# Altium PCB AdamCapteurs.PcbDoc
Units mm, origin at the board's own origin, x right, y up, seen from the top; angles counter-clockwise.
Board outline 70.48 x 48.26 mm, 2 copper layers (Top Layer, Bottom Layer); 61 components, 47 nets, 235 pads, 65 vias.
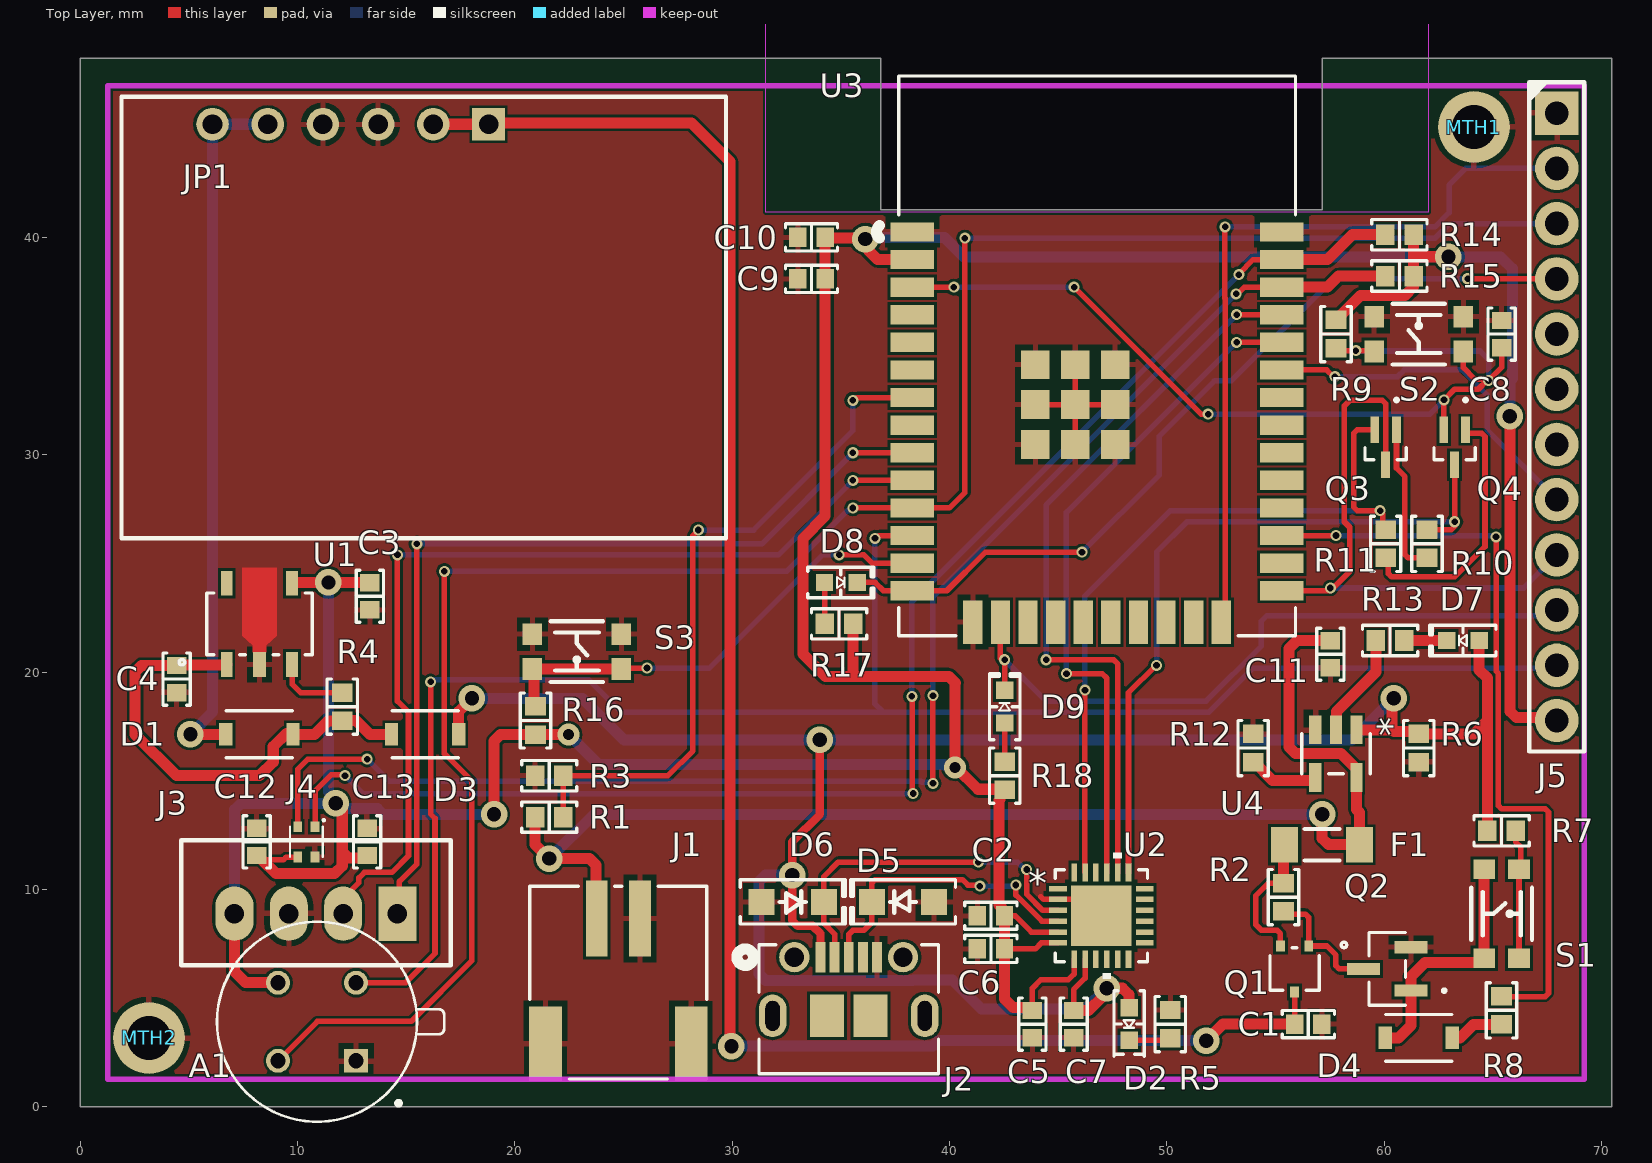
[diagram p0: Top Layer view]
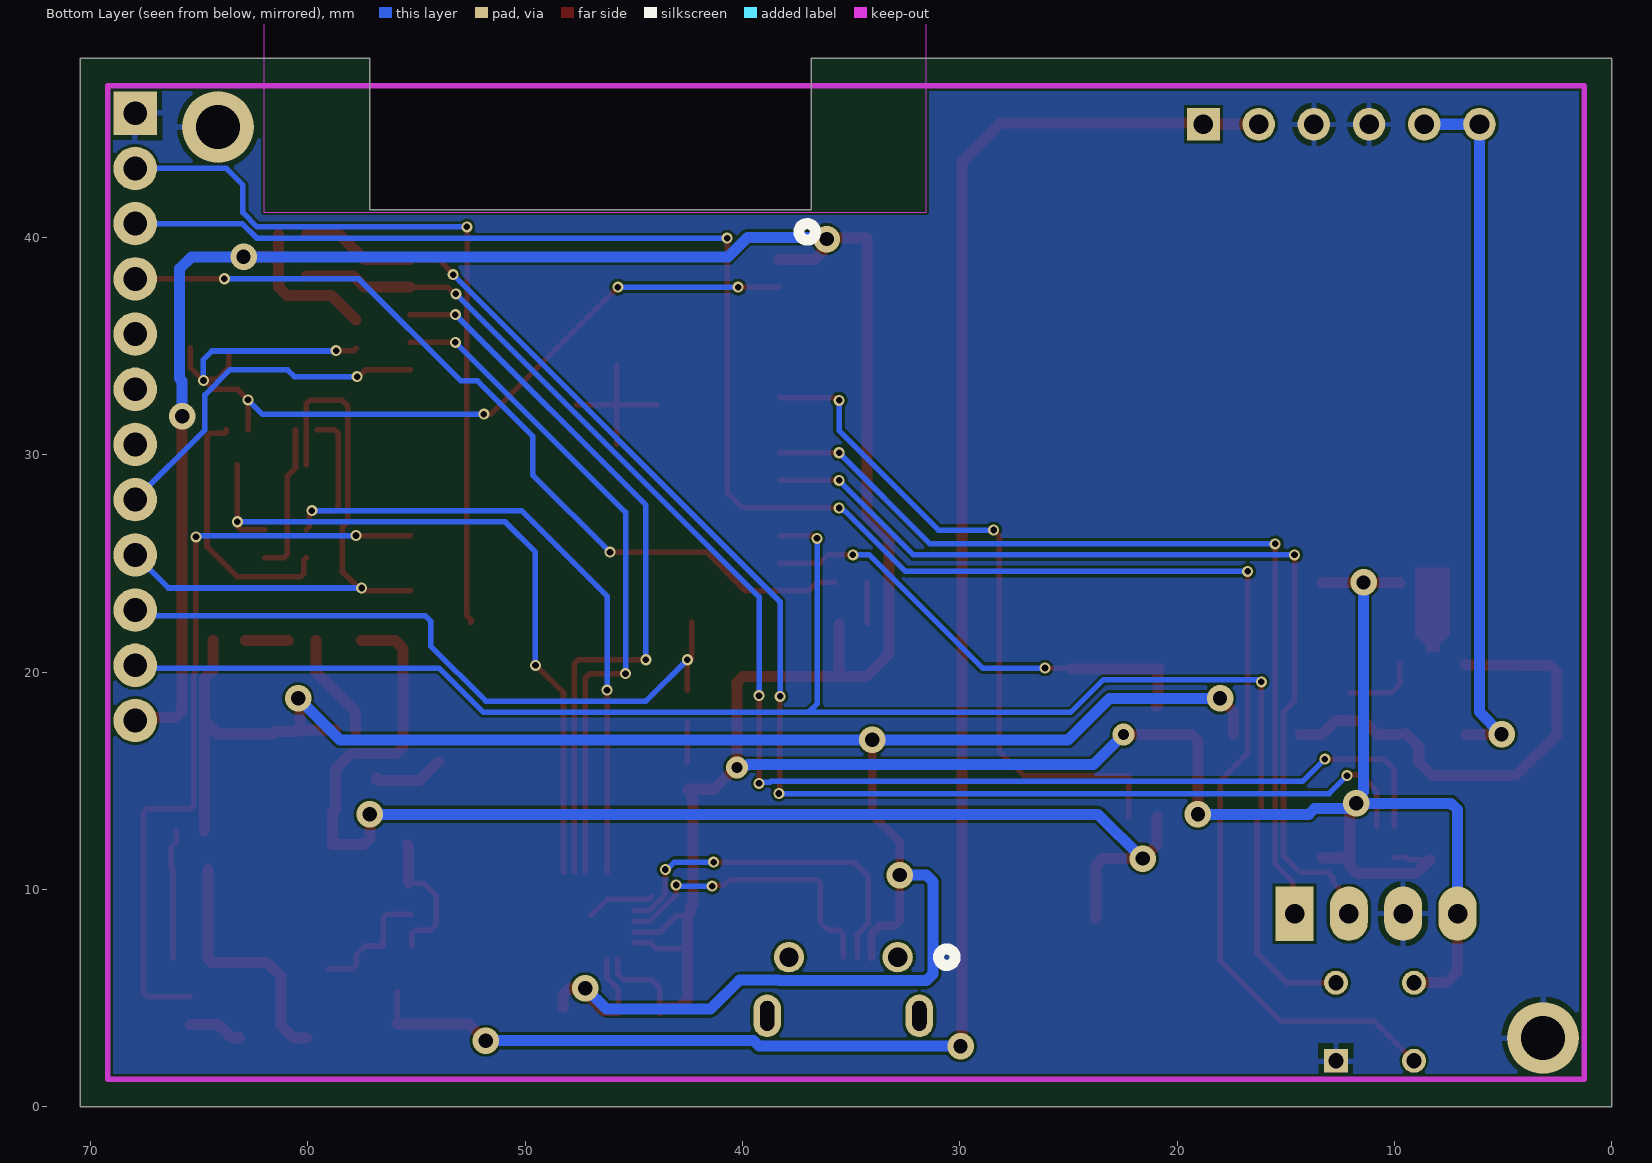
[diagram p1: Bottom Layer view, seen from below]
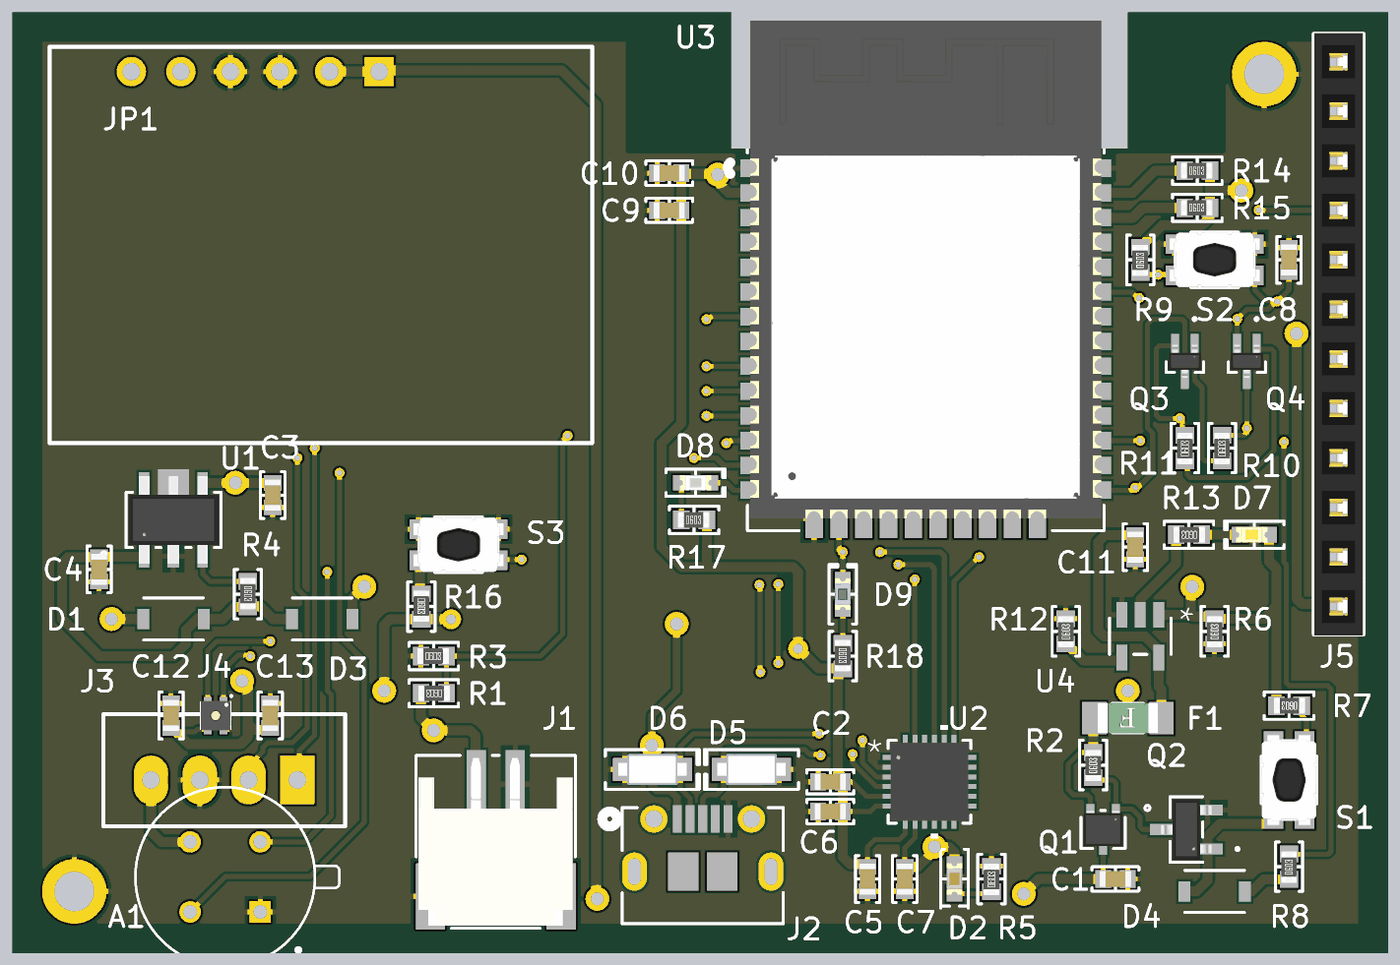
[diagram p2: 3D render of the assembled board from above, using the file's embedded part models]

## Layer stack, top to bottom
Top Solder: solder mask 0.0102, Solder Resist, Dk 3.5
Top Layer: signal copper 0.0356
Dielectric 1: dielectric 0.32, FR-4, Dk 4.8
Bottom Layer: signal copper 0.0356
Bottom Solder: solder mask 0.0102, Solder Resist, Dk 3.5

## Board outline
0,0 70.485,0 70.485,48.26 57.15,48.26 57.15,41.275 36.83,41.275 36.83,48.26 0,48.26

## Design rules (kind name [scope] priority, off if disabled: settings)
Clearance [All] p1: gap=0.127 ignorepadtopadclearanceinfootprint=FALSE
HoleSize [All] p1: absolutevalues=TRUE maxlimit=22.86 minlimit=0.3 maxpercent=80.000 minpercent=20.000
MinimumSolderMaskSliver [All] p1: minsoldermaskwidth=0.127
PolygonConnect [All] p1: thpad.connectstyle=Relief thpad.reliefconductorwidth=0.254 thpad.reliefentries=4 thpad.polygonreliefangle="90 Angle" thpad.airgapwidth=0.254 smdpad.connectstyle=Relief smdpad.reliefconductorwidth=0.254 smdpad.reliefentries=4 smdpad.polygonreliefangle="90 Angle" smdpad.airgapwidth=0.254 via.connectstyle=Direct via.reliefconductorwidth=0.254 via.reliefentries=4 via.polygonreliefangle="90 Angle" via.airgapwidth=0.254
RoutingVias [All] p1: holewidth=0.711 width=1.27 viastyle="Through Hole" minholewidth=0.3 minwidth=0.5 maxholewidth=0.711 maxwidth=1.27
SilkToSilkClearance [All] p1: silktosilkclearance=0
SilkToSolderMaskClearance [IsPad] p1: minsilkscreentomaskgap=0 clearancetoexposedcopper=TRUE
SolderMaskExpansion [All] p1: expansion=0.102 istentingtop=FALSE
Width [All] p1: maxlimit=2.54 minlimit=0.254 preferedwidth=0.254 minimp=50.000000 maximp=50.000000 favimp=50.000000
26 further rules are at their usual default settings.

## Classes and differential pairs
component class AdamCapteurs-2: A1 C12 C13 D8 D9 J3 J4 J5 R14 R15 R16 R17 R18 S3 U3
component class AdamCapteurs-1: C1 C2 C3 C4 C5 C6 C7 C8 C9 C10 C11 D1 D2 D3 D4 D5 D6 D7 F1 J1 J2 JP1 MTH1 MTH2 Q1 Q2 Q3 Q4 R1 R2 R3 R4 R5 R6 R7 R8 R9 R10 R11 R12 R13 S1 S2 U1 U2 U4

## Components (designator, comment, footprint, x,y, rotation, side; value= is the part's Value field where it differs from the comment)
A1 "PYQ_1548/7660" TO254P940H440-4 10.904,3.919 r180 top
C1 "10 µF" "CAP 0603" 56.515,3.81 r180 top
C2 "10 µF" "CAP 0603" 41.91,8.796 r0 top
C3 "10 µF" "CAP 0603" 13.335,23.495 r90 top
C4 "10 µF" "CAP 0603" 4.445,19.685 r90 top
C5 "10 µF" "CAP 0603" 43.815,3.81 r90 top
C6 "100 nF" "CAP 0603" 41.91,7.272 r0 top
C7 "100 nF" "CAP 0603" 45.72,3.81 r90 top
C8 "10 µF" "CAP 0603" 65.405,35.56 r270 top
C9 "100 nF" "CAP 0603" 33.655,38.1 r0 top
C10 "100 nF" "CAP 0603" 33.655,40.005 r0 top
C11 "10 µF" "CAP 0603" 57.531,20.828 r90 top
C12 "100 nF" "CAP 0603" 8.128,12.192 r270 top
C13 "100 nF" "CAP 0603" 13.208,12.192 r270 top
D1 "PMEG2010ER,115" DIODE_PMEG2010ER,115_NEX 8.255,17.145 r180 top
D2 "Red" "Red Led 0603" 48.26,3.81 r270 top
D3 "PMEG2010ER,115" DIODE_PMEG2010ER,115_NEX 15.875,17.145 r0 top
D4 "PMEG2010ER,115" DIODE_PMEG2010ER,115_NEX 61.595,3.175 r0 top
D5 "CPDQ5V0-HF" SOD123F 37.868,9.431 r180 top
D6 "CPDQ5V0-HF" SOD123F 32.788,9.431 r0 top
D7 "Yellow" "YELLOW LED 0603 - duplicate" 63.452,21.461 r180 top
D8 "Green" "Green LED 0603" 34.925,24.13 r0 top
D9 "Blue" "Blue LED 0603" 42.545,18.415 r90 top
F1 "0ZCJ0100FF2E" "Fuse 500mA 0.6mm" 57.15,12.065 r180 top
J1 "CONN JST 2P SM 90DEG" S2B-PH-SM4-TB_LF__SN 24.765,5.715 r0 top
J2 "Micro USB" CONN_1050170001_MOL 35.368,4.496 r0 top
J3 "B4B-XH-A(LF)(SN)" "CONN JST 4PIN" 10.855,8.89 r180 top
J4 "SHT4XI-DIGITAL" SHT4XI-DIGITAL 10.414,12.192 r270 top
J5 "PPTC121LFBN-RC" "CONN 12PIN FEMALE" 67.945,31.777 r0 top
JP1 "Boost Regulator" HDR1X6-Power 18.796,45.212 r180 top
MTH1 "HOLE" MNT_hole 64.135,45.085 r0 top
MTH2 "HOLE" MNT_hole 3.175,3.175 r90 top
Q1 "SSM3J130TU,LF" UFM_TOS 55.88,6.35 r180 top
Q2 "MMBT2222AM3T5G" SOT_4C-E3-08_VIS-M 60.147,6.35 r90 top
Q3 "MMBT2222ATT1G" SOT-416_1P65X0P9_ONS-M 60.071,30.353 r180 top
Q4 "MMBT2222ATT1G" SOT-416_1P65X0P9_ONS-M 63.246,30.353 r180 top
R1 "100K" "RES 0603" 21.59,13.335 r180 top
R2 "10K" "RES 0603" 55.372,9.652 r90 top
R3 "100K" "RES 0603" 21.59,15.24 r0 top
R4 "100K" "RES 0603" 12.065,18.415 r270 top
R5 "330" "RES 0603" 50.165,3.81 r90 top
R6 "100K" "RES 0603" 61.595,16.51 r90 top
R7 "4K7" "RES 0603" 65.405,12.7 r180 top
R8 "1K" "RES 0603" 65.405,4.445 r90 top
R9 "10K" "RES 0603" 57.785,35.56 r90 top
R10 "10K" "RES 0603" 61.976,25.908 r90 top
R11 "10K" "RES 0603" 60.071,25.908 r90 top
R12 "4K7" "RES 0603" 53.975,16.51 r90 top
R13 "330" "RES 0603" 60.277,21.461 r180 top
R14 "4K7" "RES 0603" 60.706,40.132 r0 top
R15 "4K7" "RES 0603" 60.706,38.227 r0 top
R16 "4K7" "RES 0603" 20.955,17.78 r270 top
R17 "330" "RES 0603" 34.925,22.225 r0 top
R18 "330" "RES 0603" 42.545,15.24 r270 top
S1 "KMR741NG ULC LFS" "Switch Lin SMD" 65.405,8.89 r270 top
S2 "KMR741NG ULC LFS" "Switch Lin SMD" 61.595,35.56 r0 top
S3 "KMR741NG ULC LFS" "Switch Lin SMD" 22.86,20.955 r180 top
U1 "AP2112K-3.3TRG1" AP2112R5-3.3TRG1_DIO 8.255,22.225 r0 top
U2 "CP2104-F03-GMR" QFN_F03-GMR_SIL-M 46.99,8.796 r0 top
U3 "ESP32-WROOM-32 (8MB)" ESP32-WROOM-32D 46.794,34.555 r0 top
U4 "MCP73831T-2ACI/OT" SOT23_MCP73831T-2ACI/OT_HNW 57.785,16.256 r270 top

## Footprints (in the part's own frame and the unit in brackets; to place one, negate y for a bottom-side part, rotate by r counter-clockwise, add the part's x,y. Pads: shape width x height; smd on the part's side, far side on the other; paste and mask are expansions set on the pad)
AP2112R5-3.3TRG1_DIO [mil]
  rect 21x45 smd paste+0 mask+0: 1(-59.06,-73.5) 3(59.06,-73.5) 4(59.06,73.5) 5(-59.06,73.5)
  rect 24x45 smd paste+0 mask+0: 2(0,-73.5)
  Top Layer region: 12,-51 -12,-51 -12,-39 -31.5,-21.5 -31.5,102 -10.5,102 10.5,102 31.5,102 31.5,-21.5 12,-39
  silkscreen extent -145,-74 96,56, body extent -91,-88 91,88, height 65
"Blue LED 0603" [mm] "Blue LED"
  rect 0.8x0.8 smd: 1(-0.75,0) 2(0.75,0)
  silkscreen extent -1.52,-0.7 1.52,0.7, body extent -0.8,-0.4 0.8,0.4, height 0.53
"CAP 0603" [mm] "Cap ceramique 0603"
  rect 0.8x0.9 smd: 1(-0.625,0) 2(0.625,0)
  silkscreen extent -1.2,-0.63 1.2,0.63, body extent -0.8,-0.41 0.8,0.41, height 0.82
"CONN 12PIN FEMALE" [mm] "12 pin female conn 0.5mm spacing"
  rect 2x2 hole 1.1: 1(0,13.943)
  round 2 hole 1.1: 2(0,11.403) 3(0,8.863) 4(0,6.323) 5(0,3.783) 6(0,1.243) 7(0,-1.297) 8(0,-3.837) 9(0,-6.377) 10(0,-8.917) 11(0,-11.457) 12(0,-13.997)
  silkscreen extent -1.27,-15.43 1.27,15.4, body extent -1.25,-15.47 1.25,15.41, height 8.5
"CONN JST 4PIN" [mm] "Conn 4 pin JST"
  rect 1.75x2.5 hole 0.9: 1(-3.75,0)
  oval 1.75x2.5 hole 0.9: 2(-1.25,0) 3(1.25,0) 4(3.75,0)
  silkscreen extent -6.2,-3.38 6.2,2.38
CONN_1050170001_MOL [mil]
  rect 18x55 smd paste+0 mask+0: 1(-51.18,94.28) 2(-25.59,94.28) 3(0,94.28) 4(25.59,94.28) 5(51.18,94.28)
  rect 61x77 smd: 6(-39.37,-12.02) 7(39.37,-12.02)
  round 55 hole 35 mask+0: 8(-98.43,94.28) 9(98.43,94.28)
  oval 50x77 hole 26 slot 54 at 90 deg mask+0: S_1(-137.8,-12.02) S_2(137.8,-12.02)
  Multi-Layer lines w26: -137.8,-25.52 -137.8,1.48 ; 137.8,-25.52 137.8,1.48
  silkscreen extent -202,-117 162,117, body extent 0,0 10,10, height 10
DIODE_PMEG2010ER,115_NEX [mil]
  rect 24x41 smd paste+0 mask+0: 1(-60.83,0) 2(60.83,0)
  silkscreen extent -60,-43 60,43, body extent 0,0 10,10, height 10
ESP32-WROOM-32D [mil] "ESP32-WROOM-32D"
  rect 79x35 smd paste+0 mask+0: 1(-334.65,224.56) 2(-334.65,174.56) 3(-334.65,124.56) 4(-334.65,74.56) 5(-334.65,24.56) 6(-334.65,-25.44) 7(-334.65,-75.44) 8(-334.65,-125.44) 9(-334.65,-175.44) 10(-334.65,-225.44) 11(-334.65,-275.44) 12(-334.65,-325.44) 13(-334.65,-375.44) 14(-334.65,-425.44) 25(334.65,-425.44) 26(334.65,-375.44) 27(334.65,-325.44) 28(334.65,-275.44) 29(334.65,-225.44) 30(334.65,-175.44) 31(334.65,-125.44) 32(334.65,-75.44) 33(334.65,-25.44) 34(334.65,24.56) 35(334.65,74.56) 36(334.65,124.56) 37(334.65,174.56) 38(334.65,224.56)
  rect 35x79 smd: 15(-225,-482.18) 16(-175,-482.18) 17(-125,-482.18) 18(-75,-482.18) 19(-25,-482.18) 20(25,-482.18) 21(75,-482.18) 22(125,-482.18) 23(175,-482.18) 24(225,-482.18)
  rect 52x52 smd: 39(-111.78,-160.44) 39(-111.78,-88.2) 39(-111.78,-15.96) 39(-39.54,-160.44) 39(-39.54,-88.2) 39(-39.54,-15.96) 39(32.71,-160.44) 39(32.71,-88.2) 39(32.71,-15.96)
  Keep-Out Layer region: -600,700 600,700 600,260 -600,260
  silkscreen extent -400,-507 360,507, body extent -354,-482 354,522, height 128
"Fuse 500mA 0.6mm" [mm]
  rect 1.25x1.65 smd: 1(-1.725,0) 2(1.725,0)
  silkscreen extent -0.8,-0.72 0.8,0.72, body extent -1.55,-0.77 1.55,0.78, height 0.76
"Green LED 0603" [mm] "Green led SMD"
  rect 0.8x0.8 smd: 1(-0.671,0) 2(0.829,0)
  silkscreen extent -1.45,-0.7 1.6,0.7, body extent -0.72,-0.4 0.88,0.4, height 0.53
HDR1X6-Power [mm] "Connector; Header; 6 Position"
  rect 1.5x1.5 hole 0.9: 1(0,0)
  round 1.5 hole 0.9: 2(2.54,0) 3(5.08,0) 4(7.62,0) 5(10.16,0) 6(12.7,0)
  silkscreen extent -10.92,-1.27 16.89,19.05
MNT_hole [mil]
  round 130 hole 80: 1(0,0)
QFN_F03-GMR_SIL-M [mil]
  rect 32x10 smd paste+0 mask+0: 1(-78.5,49.23) 2(-78.5,29.53) 3(-78.5,9.84) 4(-78.5,-9.85) 5(-78.5,-29.54) 6(-78.5,-49.23) 13(78.5,-49.23) 14(78.5,-29.54) 15(78.5,-9.85) 16(78.5,9.84) 17(78.5,29.53) 18(78.5,49.23)
  rect 10x32 smd paste+0 mask+0: 7(-49.22,-78.5) 8(-29.53,-78.5) 9(-9.84,-78.5) 10(9.84,-78.5) 11(29.53,-78.5) 12(49.22,-78.5) 19(49.22,78.5) 20(29.53,78.5) 21(9.84,78.5) 22(-9.84,78.5) 23(-29.53,78.5) 24(-49.22,78.5)
  rect 110x110 smd paste-54.5 mask+0: 25(0,0)
  silkscreen extent -84,-114 84,114, body extent -79,-79 79,79, height 32
"Red Led 0603" [mm] "red led smd"
  rect 0.8x0.8 smd: 1(-0.756,0.008) 2(0.744,0.008)
  silkscreen extent -1.53,-0.69 1.49,0.71, body extent -0.81,-0.39 0.79,0.41, height 0.53
"RES 0603" [mm]
  rect 0.85x0.95 smd: 1(-0.65,0) 2(0.65,0)
  silkscreen extent -1.27,-0.7 1.27,0.7, body extent -0.83,-0.4 0.77,0.4, height 0.45
S2B-PH-SM4-TB_LF__SN [mil] "Conn 2 pin smd horizontal S2B"
  rect 39x138 smd paste+0 mask+0: 1(-39.37,116.35) 2(39.37,116.35)
  rect 59x134 smd: 3(-131.89,-110.03) 4(131.89,-110.03)
  silkscreen extent -160,-174 160,174, body extent -156,-169 155,169, height 217
SHT4XI-DIGITAL [mm]
  rect 0.5x0.4 smd: 1(-0.7,0.4) 2(-0.7,-0.4) 3(0.7,-0.4) 4(0.7,0.4)
  silkscreen extent -1.05,-0.75 0.7,0.85, body extent -0.75,-0.75 0.75,0.75, height 0.59
SOD123F [mm] "Footprint diode"
  rect 1.2x1.2 smd: 1(-1.427,0) 2(1.433,0)
  silkscreen extent -2.41,-1.02 2.42,1.02, body extent -1.75,-0.8 1.75,0.8, height 1.1
SOT23_MCP73831T-2ACI/OT_HNW [mil]
  rect 52x22 smd paste+0 mask+0: 1(-43.12,37.4) 2(-43.12,0) 3(-43.12,-37.4) 4(43.12,-37.4) 5(43.12,37.4)
  silkscreen extent -37,-62 37,62, body extent 0,0 10,10, height 10
SOT-416_1P65X0P9_ONS-M [mil]
  rect 16x48 smd paste+0 mask+0: 1(-19.68,-31.5) 2(19.68,-31.5) 3(0,31.5)
  silkscreen extent -38,-88 38,23, body extent -33,-34 33,34, height 35
SOT_4C-E3-08_VIS-M [mil]
  rect 22x60 smd paste+0 mask+0: 1(-39.37,-43) 2(39.37,-43) 3(0,43)
  silkscreen extent -66,-106 66,33, body extent -61,-51 61,51, height 45
"Switch Lin SMD" [mm]
  rect 0.9x1 smd mask+0.1: 1(-2.05,0.802) 2(2.05,0.802) 3(-2.05,-0.798) 4(2.05,-0.798)
  silkscreen extent -1.2,-1.4 1.2,1.4, body extent -2.3,-1.4 2.3,1.4, height 2.5
TO254P940H440-4 [mm]
  rect 1.1x1.1 hole 0.7: 1(-1.796,1.796)
  round 1.1 hole 0.7: 2(-1.796,-1.796) 3(1.796,-1.796) 4(1.796,1.796)
  silkscreen extent -5.85,-4.6 4.6,4.6
UFM_TOS [mil]
  rect 16x20 smd paste+0 mask+0: 1(-25.59,-41.5) 2(25.59,-41.5) 3(0,41.5)
  silkscreen extent -94,-48 44,39, body extent -39,-38 39,38, height 32
"YELLOW LED 0603 - duplicate" [mm] "Yellow led 0603 SMD"
  rect 0.8x0.8 smd: 1(-0.925,0) 2(0.575,0)
  silkscreen extent -1.7,-0.7 1.35,0.7, body extent -0.85,-0.4 0.75,0.4, height 0.53

## Part data
A1: "Sensor PIR _Passive Infrared_ Low Power TO-5 Variant, 4 Leads, Lens Top Metal Can", Package="TO-5 Excelitas Technologies", Supplier Part Number 1=1601-1008-ND, Availability=Unavailable, Manufacturer Part Number 1=PYQ_1548/7660, MF="Excelitas Technologies", MP="PYQ 1548/7660", price=None, SnapEDA_Link=https://www.snapeda.com/parts/PYQ%201548/7660/Excelitas%20Technologies/view-part/4328334/?ref=snap, Supplier 1=Digi-Key
C1 C2 C3 C4 C5 C8 C11: library part GRM188C81A106MA73D, "CAP CER 10UF 10V X6S 0603", Device Package="0603 (1608 Metric)", manufacturer="Murata Electronics", Operating Temperature="-55°C ~ 105°C", Supplier Part Number 1=490-7197-1-ND, Temperature Coefficient=X6S, Tolerance=±20%, Voltage - Rated=10V, Applications="General Purpose", Capacitance="10 µF", componentlink1description=Datasheet, componentlink1url=https://www.murata.com/~/media/webrenewal/support/library/catalog/products/capacitor/mlcc/c02e.ashx?la=en-us, componentlink2description="DigiKey Link", componentlink2url=https://www.digikey.com/en/products/detail/murata-electronics/GRM188C81A106MA73D/3900461, lastupdated="2023-03-27 19:07:26", Lifecycle Status=Active, Manufacturer Part Number 1=GRM188C81A106MA73D, Minimum Order=1, Mounting Type="Surface Mount, MLCC", Package / Case="0603 (1608 Metric)", packaging=TapeAndReel, Part Number=GRM188C81A106MA73D, Part Status=Active, partid=2456, price=0.04, series=GRM, Size / Dimension="0.063\" L x 0.031\" W (1.60mm x 0.80mm)", Supplier 1=DigiKey, Thickness (Max)="0.039\" (1.00mm)"
C6 C7 C9 C10 C12 C13: library part GRM188C81A106MA73D, "CAP CER 10UF 10V X6S 0603", Capacitance="10 µF", Device Package="0603 (1608 Metric)", manufacturer="Murata Electronics", Operating Temperature="-55°C ~ 105°C", Supplier Part Number 1=490-7197-1-ND, Temperature Coefficient=X6S, Tolerance=±20%, Voltage - Rated=10V, Applications="General Purpose", componentlink1description=Datasheet, componentlink1url=https://www.murata.com/~/media/webrenewal/support/library/catalog/products/capacitor/mlcc/c02e.ashx?la=en-us, componentlink2description="DigiKey Link", componentlink2url=https://www.digikey.com/en/products/detail/murata-electronics/GRM188C81A106MA73D/3900461, lastupdated="2023-03-27 19:07:26", Lifecycle Status=Active, Manufacturer Part Number 1=GRM188C81A106MA73D, Minimum Order=1, Mounting Type="Surface Mount, MLCC", Package / Case="0603 (1608 Metric)", packaging=TapeAndReel, Part Number=GRM188C81A106MA73D, Part Status=Active, partid=2456, price=0.04, series=GRM, Size / Dimension="0.063\" L x 0.031\" W (1.60mm x 0.80mm)", Supplier 1=DigiKey, Thickness (Max)="0.039\" (1.00mm)"
D1 D3 D4: "Diode shotkey", Manufacturer Part Number 1=PMEG2010ER115, Supplier Part Number 1=1727-5192-1-ND, ADAM Inventory Number 1=E00031, Supplier 1=Digi-Key
D2: library part "0603 RED LED", "0603 RED LED", Current - Test=20mA, Device Package="0603 (1608 Metric)", Lens Color=Colorless, manufacturer="American Bright Optoelectronics Corporation", Manufacturer Part Number 1=BL-HUB36A-AV-TRB, Millicandela Rating=94mcd, Supplier Device Package=0603, Supplier Part Number 1=BL-HUB36A-AV-TRBCT-ND, Voltage - Forward (Vf) (Typ)=2.2V, ADAM Inventory Number 1=E00069, Color=Red, componentlink1description=Datasheet, componentlink1url=https://americanbrightled.com/pdffiles/smt/BL-HUB36A-AV-TRB.pdf, componentlink2description="DigiKey Link", componentlink2url=https://www.digikey.com/en/products/detail/american-bright-optoelectronics-corporation/BL-HUB36A-AV-TRB/9678174, Configuration=Standard, Height (Max)=0.70mm, lastupdated="2023-03-27 19:53:19", Lens Style="Rectangle with Flat Top", Lens Transparency=Clear, Lifecycle Status=Active, Minimum Order=1, Mounting Type="Surface Mount", Package / Case="0603 (1608 Metric)", packaging=TapeAndReel, Part Status=Active, partid=1020, price=0.04, series=-, Size / Dimension="1.60mm L x 0.80mm W", Supplier 1=DigiKey, Viewing Angle=120°, Wavelength - Dominant=632nm, Wavelength - Peak=645nm
D5 D6: "Diode TVS bidirectionnel", Mfr_Name=Comchip, Manufacturer Part Number 1=CPDQ5V0-HF
D7: library part "0603 YELLOW LED", "0603 YELLOW", Current - Test=20mA, Device Package="0603 (1608 Metric)", Lens Color=Colorless, manufacturer="American Bright Optoelectronics Corporation", Manufacturer Part Number 1=BL-HKC36D-AV-TRB, Millicandela Rating=120mcd, Supplier Device Package=0603, Supplier Part Number 1=BL-HKC36D-AV-TRBCT-ND, Voltage - Forward (Vf) (Typ)=2V, ADAM Inventory Number 1=E00068, Color=Yellow, componentlink1description=Datasheet, componentlink1url=http://americanbrightled.com/pdffiles/smt/BL-HKC36D-AV-TRB.pdf, componentlink2description="DigiKey Link", componentlink2url=https://www.digikey.com/en/products/detail/american-bright-optoelectronics-corporation/BL-HKC36D-AV-TRB/9678175, Configuration=0603, Height (Max)=0.85mm, lastupdated="2023-03-27 19:54:01", Lens Size="0.87mm x 0.80mm", Lens Style="Rectangle with Flat Top", Lens Transparency=Clear, Lifecycle Status=Active, Minimum Order=1, Mounting Type="Surface Mount", Package / Case="0603 (1608 Metric)", packaging=TapeAndReel, Part Status=Active, partid=82, price=0.04, series=-, Size / Dimension="1.60mm L x 0.80mm W", Supplier 1=DigiKey, Viewing Angle=120°, Wavelength - Dominant=589nm, Wavelength - Peak=590nm
D8: library part "0603 GREEN LED", "LED GREEN 0603 SMD", Current - Test=20mA, Device Package="0603 (1608 Metric)", Lens Color=1.24mm, manufacturer=Dialight, Manufacturer Part Number 1=5973316507F, Millicandela Rating=34mcd, Supplier Device Package=0603, Supplier Part Number 1=350-4373-1-ND, Voltage - Forward (Vf) (Typ)=2V, ADAM Inventory Number 1=E00070, Color=Green, componentlink1description=Datasheet, componentlink1url=http://www.dialightsignalsandcomponents.com/Assets/Drawings/2D_Drawings_DrawingDetailedSpec/NewDrawings/C18371C.pdf, componentlink2description="DigiKey Link", componentlink2url=https://www.digikey.com/en/products/detail/dialight/5973316507F/9385428, Configuration=Standard, Height (Max)=1.24mm, lastupdated="2023-03-27 19:52:49", Lens Style="Round with Domed Top", Lifecycle Status=Active, Minimum Order=1, Mounting Type="Surface Mount", Package / Case="0603 (1608 Metric)", packaging=TapeAndReel, Part Status=Active, partid=587, price=0.13, series=597, Size / Dimension="1.60mm L x 0.80mm W", Supplier 1=DigiKey, Wavelength - Dominant=560nm
D9: library part "0603 BLUE LED", "Blue 470nm LED Indication - Discrete 3.3V 0603 (1608 Metric)", Manufacturer Part Number 1=APT1608LVBC/D, Supplier Part Number 1=754-1933-1-ND, ADAM Inventory Number 1=E00071, Supplier 1=Digi-Key
F1: "Polyswitch 1A 5V", Mfr_Name="Littelfuse Inc", Supplier Part Number 1=507-1806-1-ND, ADAM Inventory Number 1=E00081, Manufacturer Part Number 1=0ZCJ0100FF2E, Supplier 1=Digi-Key
J1: "CONN SM JST 2P", Manufacturer Part Number 1=S2B-PH-SM4-TB(LF)(SN), Mfr_Name=JST, ADAM Inventory Number 1=E00052, Copyright="Copyright (C) 2023 Ultra Librarian. All rights reserved.", RefDes=RefDes, Supplier 1="Arrow Electronics", Supplier Part Number 1=S2B-PH-SM4-TB(LF)(SN), Type=DEV
J2: library part 1050170001, "No Description Available", Mfr_Name="Molex Connector Corporation", Copyright="Copyright (C) 2023 Ultra Librarian. All rights reserved.", Manufacturer Part Number 1=1050170001, RefDes=RefDes, Type=DEV
J3: library part "CONN JST 4POS TH", "CONN HEADER VERT 4POS 2.5MM", Current Rating (Amps)=3A, Insulation Color=Natural, manufacturer="JST Sales America Inc.", Material Flammability Rating="UL94 V-0", Operating Temperature="-25°C ~ 85°C", Supplier Part Number 1=455-2249-ND, Voltage Rating=250V, ADAM Inventory Number 1=E00050, componentlink1description=Datasheet, componentlink1url=http://www.jst-mfg.com/product/pdf/eng/eXH.pdf, componentlink2description="DigiKey Link", componentlink2url=http://digikey.com/product-detail/en/jst-sales-america-inc/B4B-XH-A-LF-SN/455-2249-ND/1651047, Connector Type=Header, Contact Finish - Mating=Tin, Contact Finish - Post=Tin, Contact Length - Post="0.134\" (3.40mm)", Contact Material=Brass, Contact Shape=Square, Contact Type="Male Pin", Fastening Type="Detent Lock", Insulation Height="0.276\" (7.00mm)", Insulation Material="Polyamide (PA66), Nylon 6/6", lastupdated="2020-01-12 23:46:34", Lifecycle Status=Active, Manufacturer Part Number 1=B4B-XH-A(LF)(SN), Minimum Order=1, Mounting Type="Through Hole", Number of Positions=4, Number of Positions Loaded=All, Number of Rows=1, packaging=Bulk, Part Status=Active, partid=69, Pitch - Mating="0.098\" (2.50mm)", price=0.21, series=XH, Shrouding="Shrouded - 4 Wall", Style="Board to Cable/Wire", Supplier 1=DigiKey, Termination="Press-Fit, Solder"
J4: "Industrial Grade Digital Relative Humidity Temperature Sensor, Â±2% / max 4% RH, Â±0.2 Â°C", Manufacturer Part Number 1=SHT40I-AD1B-R3, Package="DFN-4 Sensirion", Supplier Part Number 1=1649-SHT40I-AD1B-R3CT-ND, Availability="In Stock", Check_prices=https://www.snapeda.com/parts/SHT40I-AD1B-R3/Sensirion/view-part/?ref=eda, MF=Sensirion, MP=SHT40I-AD1B-R3, price=None, Purchase-URL=https://pricing.snapeda.com/search/part/SHT40I-AD1B-R3/?ref=eda, SnapEDA_Link=https://www.snapeda.com/parts/SHT40I-AD1B-R3/Sensirion/view-part/?ref=snap, Supplier 1=Digi-Key
J5: library part "12PO FEM HEADER", "CONN RCPT 12POS 0.1 GOLD PCB", Current Rating (Amps)=3A, Insulation Color=Black, manufacturer="Harwin Inc.", Material Flammability Rating="UL94 V-0", Operating Temperature="-40°C ~ 105°C", Supplier Part Number 1=S6100-ND, ADAM Inventory Number 1=E00067, componentlink1description=Datasheet, componentlink1url=https://cdn.harwin.com/pdfs/C001XX_M20_Series_Connectors.pdf, componentlink2description="DigiKey Link", componentlink2url=http://digikey.com/product-detail/en/harwin-inc/M20-7821242/952-1852-ND/3727819, Connector Type=Receptacle, Contact Finish - Mating=Gold, Contact Finish - Post=Tin, Contact Finish Thickness - Mating=Flash, Contact Type="Female Socket", Fastening Type=Push-Pull, lastupdated="2022-09-21 18:59:31", Lifecycle Status=Active, Manufacturer Part Number 1=PPTC121LFBN-RC, Mated Stacking Heights="11.04mm, 12.63mm", Minimum Order=5004, Mounting Type="Through Hole", Number of Positions=12, Number of Positions Loaded=All, Number of Rows=1, packaging=Tube, Part Status=Active, price=0.74, series=M20, Style="Board to Board or Cable", Supplier 1=Digi-Key, Termination=Solder
JP1: library part "HEADER 6", Manufacturer Part Number 1=MEZD41501A-A
MTH1 MTH2: library part ANTENNA
Q1: "No Description Available", Mfr_Name="Toshiba Electronic Devices & Storage Corp.", Supplier Part Number 1=SSM3J130TULFCT-ND, Manufacturer Part Number 1=SSM3J130TU,LF, RefDes=Refdes, Supplier 1=Digi-Key, Type=Type
Q2: library part "TRANS NPN 40V", "TRANS NPN 40V 0.6A SOT-723", Current - Collector (Ic) (Max)=600mA, Current - Collector Cutoff (Max)="10nA (ICBO)", DC Current Gain (hFE) (Min) @ Ic, Vce="100 @ 150mA, 10V", Frequency - Transition=300MHz, manufacturer="ON Semiconductor", Operating Temperature="-55°C ~ 150°C (TJ)", Package / Case=SOT-723, Power - Max=640mW, Supplier Part Number 1=MMBT2222AM3T5GOSCT-ND, Voltage - Collector Emitter Breakdown (Max)=40V, ADAM Inventory Number 1=E00007, componentlink1description=Datasheet, componentlink1url=http://www.onsemi.com/pub/Collateral/MMBT2222AM3-D.PDF, componentlink2description="DigiKey Link", componentlink2url=http://digikey.com/product-detail/en/on-semiconductor/MMBT2222AM3T5G/MMBT2222AM3T5GOSCT-ND/3487571, lastupdated="2023-03-28 20:16:11", Lifecycle Status=Active, Manufacturer Part Number 1=MMBT2222AM3T5G, Minimum Order=1, Mounting Type="Surface Mount", packaging=TapeAndReel, Part Status=Active, partid=22, price=0.03, series=-, Supplier 1=DigiKey, Supplier Device Package=SOT-723, Transistor Type=NPN, Vce Saturation (Max) @ Ib, Ic="1V @ 50mA, 500mA"
Q3 Q4: "TRANS NPN 40V 0.6A SC75-3", Current - Collector (Ic) (Max)=600mA, DC Current Gain (hFE) (Min) @ Ic, Vce="100 @ 150mA, 10V", Frequency - Transition=300MHz, manufacturer="ON Semiconductor", Operating Temperature="-55°C ~ 150°C (TJ)", Package / Case="SC-75, SOT-416", Power - Max=150mW, Supplier Part Number 1=MMBT2222ATT1GOSCT-ND, Voltage - Collector Emitter Breakdown (Max)=40V, componentlink1description=Datasheet, componentlink1url=http://www.onsemi.com/pub/Collateral/MMBT2222ATT1-D.PDF, componentlink2description="DigiKey Link", componentlink2url=http://digikey.com/product-detail/en/on-semiconductor/MMBT2222ATT1G/MMBT2222ATT1GOSCT-ND/1967146, lastupdated="2023-03-27 20:07:05", Lifecycle Status=Active, Manufacturer Part Number 1=MMBT2222ATT1G, Minimum Order=1, Mounting Type="Surface Mount", packaging=TapeAndReel, Part Number=MMBT2222ATT1G, Part Status=Active, partid=32, price=0.02, series=-, Supplier 1=DigiKey, Supplier Device Package="SC-75, SOT-416", Transistor Type=NPN, Vce Saturation (Max) @ Ib, Ic="1V @ 50mA, 500mA"
R1 R2 R3 R4 R6 R7 R8: library part CPF0603B100KE, "RES SMD 100K OHM 0.1% 1/16W 0603", Device Package="0603 (1608 Metric)", manufacturer="TE Connectivity Passive Product", Operating Temperature="-55°C ~ 155°C", Power (Watts)="0.063W, 1/16W", Resistance="100 kOhms", Supplier Device Package=0603, Supplier Part Number 1=A119912CT-ND, Temperature Coefficient=±25ppm/°C, Tolerance=±0.1%, componentlink1description=Datasheet, componentlink1url=https://www.te.com/commerce/DocumentDelivery/DDEController?Action=srchrtrv&DocNm=1773200&DocType=DS&DocLang=English, componentlink2description="DigiKey Link", componentlink2url=https://www.digikey.com/en/products/detail/te-connectivity-passive-product/CPF0603B100KE/2381864, Composition="Thin Film", Height - Seated (Max)="0.022\" (0.55mm)", lastupdated="2023-03-22 19:30:13", Lifecycle Status=Active, Manufacturer Part Number 1=CPF0603B100KE, Minimum Order=1, Number of Terminations=2, Package / Case="0603 (1608 Metric)", packaging=TapeAndReel, Part Number=CPF0603B100KE, Part Status=Active, partid=4883, price=0.09, series="CPF, Neohm", Size / Dimension="0.061\" L x 0.031\" W (1.55mm x 0.80mm)", Supplier 1=DigiKey
R5 R13 R17 R18: library part CPF0603B1K0E, "RES SMD 1K OHM 0.1% 1/16W 0603", Device Package="0603 (1608 Metric)", manufacturer="TE Connectivity Passive Product", Operating Temperature="-55°C ~ 155°C", Power (Watts)="0.063W, 1/16W", Resistance="1 kOhms", Supplier Device Package=0603, Supplier Part Number 1=A119887CT-ND, Temperature Coefficient=±25ppm/°C, Tolerance=±0.1%, componentlink1description=Datasheet, componentlink1url=https://www.te.com/commerce/DocumentDelivery/DDEController?Action=srchrtrv&DocNm=1773200&DocType=DS&DocLang=English, componentlink2description="DigiKey Link", componentlink2url=https://www.digikey.com/en/products/detail/te-connectivity-passive-product/CPF0603B1K0E/2390473, Composition="Thin Film", Height - Seated (Max)="0.022\" (0.55mm)", lastupdated="2023-03-28 19:30:06", Lifecycle Status=Active, Manufacturer Part Number 1=CPF0603B1K0E, Minimum Order=1, Number of Terminations=2, Package / Case="0603 (1608 Metric)", packaging=TapeAndReel, Part Number=CPF0603B1K0E, Part Status=Active, partid=4877, price=0.09, series="CPF, Neohm", Size / Dimension="0.061\" L x 0.031\" W (1.55mm x 0.80mm)", Supplier 1=DigiKey
R9 R10 R11: library part RNCS0603BKE10K0, "RES 10K OHM 0.1% 1/16W 0603", Device Package="0603 (1608 Metric)", manufacturer="Stackpole Electronics Inc", Operating Temperature="-55°C ~ 155°C", Power (Watts)="0.063W, 1/16W", Ratings=AEC-Q200, Resistance="10 kOhms", Supplier Device Package=0603, Supplier Part Number 1=RNCS0603BKE10K0CT-ND, Temperature Coefficient=±25ppm/°C, Tolerance=±0.1%, componentlink1description=Datasheet, componentlink1url=https://www.seielect.com/catalog/sei-rncs_rnch.pdf, componentlink2description="DigiKey Link", componentlink2url=https://www.digikey.com/en/products/detail/stackpole-electronics-inc/RNCS0603BKE10K0/1708836, Composition="Thin Film", Features="Anti-Corrosive, Automotive AEC-Q200, Moisture Resistant", Height - Seated (Max)="0.022\" (0.55mm)", lastupdated="2023-03-27 19:26:50", Lifecycle Status=Active, Manufacturer Part Number 1=RNCS0603BKE10K0, Minimum Order=1, Number of Terminations=2, Package / Case="0603 (1608 Metric)", packaging=TapeAndReel, Part Number=RNCS0603BKE10K0, Part Status=Active, partid=4838, price=0.07, series=RNCS, Size / Dimension="0.061\" L x 0.031\" W (1.55mm x 0.80mm)", Supplier 1=DigiKey
R12 R14 R15 R16: library part RT0603FRE074K7L, "RES SMD 4.7K OHM 1% 1/10W 0603", Device Package="0603 (1608 Metric)", manufacturer=Yageo, Operating Temperature="-55°C ~ 155°C", Power (Watts)="0.1W, 1/10W", Resistance="4.7 kOhms", Supplier Device Package=0603, Supplier Part Number 1=YAG1238CT-ND, Temperature Coefficient=±50ppm/°C, Tolerance=±1%, componentlink1description=Datasheet, componentlink1url=https://www.yageo.com/upload/media/product/productsearch/datasheet/rchip/PYu-RT_1-to-0.01_RoHS_L_11.pdf, componentlink2description="DigiKey Link", componentlink2url=https://www.digikey.com/en/products/detail/yageo/RT0603FRE074K7L/1075404, Composition="Thin Film", Height - Seated (Max)="0.022\" (0.55mm)", lastupdated="2023-03-28 19:30:03", Lifecycle Status=Active, Manufacturer Part Number 1=RT0603FRE074K7L, Minimum Order=1, Number of Terminations=2, Package / Case="0603 (1608 Metric)", packaging=TapeAndReel, Part Number=RT0603FRE074K7L, Part Status=Active, partid=5678, price=0.01, series=RT, Size / Dimension="0.063\" L x 0.031\" W (1.60mm x 0.80mm)", Supplier 1=DigiKey
S1 S2 S3: "SWITCH TACTILE SPST-NO 50MA 32V", Contact Rating @ Voltage="0.05A @ 32VDC", manufacturer=C&K, Operating Force=400gf, Operating Temperature="-40°C ~ 85°C", Supplier Part Number 1=CKN10688CT-ND, Actuator Height off PCB, Vertical=2.50mm, Actuator Orientation="Top Actuated", Actuator Type=Standard, Circuit=SPST-NO, componentlink1description=Datasheet, componentlink1url=https://dznh3ojzb2azq.cloudfront.net/products/Tactile/KMR7/documents/datasheet.pdf, componentlink2description="DigiKey Link", componentlink2url=http://digikey.com/product-detail/en/c-k/KMR741NG-ULC-LFS/CKN10688CT-ND/6035360, Illumination=Non-Illuminated, Ingress Protection="IP67 - Dust Tight, Waterproof", lastupdated="2020-04-09 10:01:05", Lifecycle Status=Active, Manufacturer Part Number 1="KMR741NG ULC LFS", Minimum Order=1, Mounting Type="Surface Mount", Outline="4.20mm x 2.80mm", packaging=TapeAndReel, Part Number="KMR741NG ULC LFS", Part Status=Active, price=0.16, series=KMR7, Supplier 1=DigiKey, Switch Function=Off-Mom, Termination Style="Gull Wing"
U1: library part "REG LIN 3.3V", "REG LINEAIRE 3.3V", Supplier Part Number 1=8043011, ADAM Inventory Number 1=E00030, Manufacturer Part Number 1=AP2112K-3.3TRG1, Supplier 1="Future Electronics"
U2: "No Description Available", Mfr_Name="Silicon Labs", Copyright="Copyright (C) 2023 Ultra Librarian. All rights reserved.", Manufacturer Part Number 1=CP2104-F03-GMR, RefDes=RefDes, Type=DEV
U3: "No Description Available", Mfr_Name="Espressif Systems", Copyright="Copyright (C) 2023 Ultra Librarian. All rights reserved.", Manufacturer Part Number 1="ESP32-WROOM-32 (8MB)", RefDes=RefDes, Type=DEV
U4: "No Description Available", Mfr_Name=Honeywell, Copyright="Copyright (C) 2023 Ultra Librarian. All rights reserved.", Manufacturer Part Number 1=MCP73831T-2ACI/OT, RefDes=RefDes, Type=DEV

## Via types
v1: diameter 0.508, hole 0.305, Top Layer to Bottom Layer, 47 vias
v2: diameter 1.219, hole 0.66, Top Layer to Bottom Layer, 16 vias
v3: diameter 1.016, hole 0.508, Top Layer to Bottom Layer, 2 vias

## Nets (pads, with @x,y where several pads share a name; then routed paths per layer and width w, separated by ;. In a path a pad name is that pad's centre, name@x,y a point inside that pad or via, vN(x,y) a via of type N, cw(c..) or ccw(c..) an arc to the next point about the centre after c; other vN are vias at no path point)
3.3V: A1.3 C2.2 C3.2 C5.2 C6.2 C9.2 C10.2 C12.2 C13.2 J3.4 J4.3 J5.12 R9.2 R14.2 R15.2 R16.2 R17.2 R18.2 U1.4 U2.5 U2.6 U2.7 U3.2 | length 193.8
  Top Layer w0.254: C12.2@8.38,11.365 9.353,11.365 9.48,11.492 J4.3 ; C6.2 43.951,7.272 44.234,7.554 44.243,7.545 U2.6 ; C2.2 43.032,8.796 43.032,8.784 43.771,8.045 U2.5 ; C5.2 43.815,5.461 44.196,5.842 45.466,5.842 45.74,6.116 U2.7
  Top Layer w0.508: J3.4 7.105,6.23 7.62,5.715 A1.3 ; C12.2@8.38,11.365 9.011,10.734 11.706,10.734 12.065,11.093 12.065,11.748 ; U1.4 9.755,24.107 9.768,24.12 C3.2 ; v2(11.767,13.97) v2@12,13.738 ; v2@12.065,13.672 12.065,11.748 ; C13.2@13.335,11.45 12.363,11.45 12.065,11.748 ; v2(19.05,13.462) 19.05,16.832 19.348,17.13 R16.2 v3(22.48,17.13) ; R17.2 35.575,19.812 ; U3.2@38.314,38.995 36.689,38.995 36.271,39.413 36.271,39.797 36.099,39.969 34.316,39.969 C10.2 C9.2 34.28,27.188 33.254,26.162 33.254,20.848 34.29,19.812 35.575,19.812 ; C5.2 43.669,4.581 42.917,4.581 42.535,4.963 C6.2 C2.2 42.389,8.942 42.389,9.191 42.291,9.289 42.291,14.121 42.324,14.154 42.324,14.419 42.495,14.59 R18.2 42.519,14.616 41.308,14.616 40.303,15.621 v3(40.259,15.621) 40.259,19.499 40.274,19.514 39.976,19.812 35.575,19.812 ; R9.2 58.913,37.338 60.96,37.338 61.341,37.719 61.341,38.212 R15.2 61.356,39.116 ; R14.2 61.356,39.116 ; v2(62.963,39.112) 62.959,39.116 61.356,39.116 ; v2(65.786,31.781) 65.786,18.205 66.084,17.907 67.818,17.907 J5.12
  Bottom Layer w0.508: J3.4 7.105,13.672 7.403,13.97 v2(11.767,13.97) 11.767,14.162 11.43,14.5 v2(11.43,24.13) ; v2@12,13.738 13.676,13.738 13.952,13.462 v2(19.05,13.462) ; v3(22.48,17.13) 23.862,15.748 39.773,15.748 39.803,15.718 40.162,15.718 v3(40.259,15.621) ; v2(36.135,39.933) 36.207,40.005 39.783,40.005 40.676,39.112 v2(62.963,39.112) 65.365,39.112 65.913,38.564 65.913,33.519 65.786,33.392 v2(65.786,31.781)
5V: D1.2 JP1.5 JP1.6 | length 32.9
  Top Layer w0.508: v2(5.08,17.145) D1.2 ; JP1.6 JP1.6@6.286,45.022
  Bottom Layer w0.508: v2(5.08,17.145) 6.096,18.161 JP1.6 JP1.5
A3_IO39: U3.5
A4_IO36: U3.4
ADC2: J3.2 U3.10 | length 43.8
  Top Layer w0.254: J3.2 12.105,9.597 12.827,10.319 12.827,10.541 13.081,10.795 14.351,10.795 15.113,11.557 15.113,18.161 14.605,18.669 v1(14.605,25.4) ; v1(35.56,28.829) U3.10
  Bottom Layer w0.254: v1(14.605,25.4) 32.131,25.4 v1(35.56,28.829)
BATLEVEL: R1.1 R3.2 U3.7 | length 31.8
  Top Layer w0.254: R1.1 R3.2 27.051,15.24 28.194,16.383 28.194,26.289 v1(28.448,26.543) ; v1(35.56,32.512) 35.629,32.512 35.756,32.639 U3.7
  Bottom Layer w0.254: v1(28.448,26.543) 30.988,26.543 35.56,31.115 v1(35.56,32.512)
DIRECKLINK: A1.2 J5.11 U3.12 | length 80.1
  Top Layer w0.254: A1.2 14.986,5.715 16.332,7.061 16.332,13.275 16.129,13.478 v1(16.129,19.558) ; v1(36.576,26.162) 36.645,26.162 36.772,26.289 U3.12
  Bottom Layer w0.254: v1(16.129,19.558) 16.231,19.66 23.393,19.66 24.892,18.161 36.957,18.161 ; v1(36.576,26.162) 36.576,18.542 36.957,18.161 ; J5.11 67.818,20.193 53.975,20.193 51.943,18.161 36.957,18.161
DOUT: J3.1 U3.9 | length 41.9
  Top Layer w0.254: J3.1 14.69,8.975 14.69,10.372 15.494,11.176 v1(15.494,25.908) ; v1(35.56,30.099) U3.9
  Bottom Layer w0.254: v1(15.494,25.908) 31.369,25.908 v1(35.56,30.099)
DTR: Q3.2 R11.2 U2.23 | length 34.6
  Top Layer w0.254: v1(46.237,19.177) 46.237,10.792 U2.23 ; Q3.2 58.763,31.153 58.614,31.004 58.614,27.581 58.763,27.432 59.795,27.432 59.944,27.283 59.944,26.685 R11.2
  Bottom Layer w0.254: v1(46.237,19.177) 46.237,23.504 50.165,27.432 v1(59.817,27.432)
EN: R4.1 U1.3 | length 3.4
  Top Layer w0.254: U1.3 9.755,19.455 10.145,19.065 R4.1
GND: A1.1 C1.1 C2.1 C3.1 C4.1 C5.1 C6.1 C7.1 C8.1 C9.1 C10.1 C11.1 C12.1 C13.1 D5.1 D6.1 J1.2 J1.3 J1.4 J2.5 J3.3 J4.4 J5.1 JP1.3 JP1.4 MTH1.1 MTH2.1 Q2.2 R3.1 R5.2 R6.1 R12.2 S2.1 S2.2 S3.3 S3.4 U1.2 U2.2 U2.25 U3.1 U3.15 U3.38 U3.39 U4.3 | length 10.5
  Top Layer w0.254: U3.39@43.955,32.315 U3.39@45.79,32.315 ; 44.211,9.667 44.333,9.546 U2.2 46.24,9.546 U2.25 ; U3.39@45.79,30.48 U3.39@45.79,32.315 ; U3.39@45.79,34.15 U3.39@45.79,32.315 ; U3.39@47.625,32.315 U3.39@45.79,32.315
GPIO0: J5.9 Q3.3 U3.25 | length 27.1
  Top Layer w0.254: U3.25 57.531,23.749 58.42,24.638 58.42,26.67 58.166,26.924 58.166,32.258 58.42,32.512 59.922,32.512 60.071,32.363 Q3.3
  Bottom Layer w0.254: v1(57.531,23.876) 66.421,23.876 J5.9
GPIO2: J5.2 U3.24 | length 35.4
  Top Layer w0.254: U3.24 52.451,22.366 52.685,22.6 52.685,37.198 52.678,37.205 52.678,40.486 v1(52.685,40.493)
  Bottom Layer w0.254: v1(52.685,40.493) 62.337,40.493 62.992,41.148 62.992,42.418 63.754,43.18 J5.2
IO14_SW2: R16.1 S3.1 S3.2 U3.13 | length 21.6
  Top Layer w0.254: S3.1 24.95,20.193 v1(26.089,20.193) ; v1(34.925,25.4) 36.068,25.4 36.449,25.019 U3.13
  Top Layer w0.508: R16.1 20.882,18.503 20.882,20.081 S3.2 S3.1
  Bottom Layer w0.254: v1(26.089,20.193) 28.956,20.193 34.163,25.4 v1(34.925,25.4)
LEDB: D9.2 J5.10 U3.16 | length 31.8
  Top Layer w0.254: U3.16 42.349,20.643 42.545,20.447 D9.2
  Bottom Layer w0.254: v1(42.545,20.574) 44.45,18.669 51.816,18.669 54.356,21.209 54.356,22.352 54.61,22.606 67.691,22.606 J5.10
LEDV: D8.2 J5.4 U3.14 | length 39.3
  Top Layer w0.254: D8.2 36.577,24.13 36.958,23.749 U3.14 39.878,23.749 41.656,25.527 v1(46.101,25.527) ; v1(63.847,38.105) 63.85,38.103 67.942,38.103 J5.4
  Bottom Layer w0.254: v1(46.101,25.527) 49.657,29.083 49.657,30.861 52.197,33.401 52.959,33.401 57.663,38.105 v1(63.847,38.105)
Lipo+: C11.2 F1.1 J1.1 R1.2 U4.5 | length 60.2
  Top Layer w0.508: R1.2 20.94,12.08 v2(21.59,11.43) 23.443,11.43 23.74,11.132 23.74,8.695 J1.1 ; v2@57.478,13.462 v2(57.15,13.462) 57.15,12.363 57.448,12.065 F1.1 ; C11.2 55.997,21.453 55.626,21.082 55.626,16.554 55.924,16.256 58.021,16.256 58.735,15.542 U4.5 ; U4.5@58.725,15.151 58.725,13.68 58.865,13.54 F1.1@58.865,12.075
  Bottom Layer w0.508: v2(21.59,11.43) 21.608,11.43 23.64,13.462 v2(57.15,13.462)
MISO: U3.31
MOSI: U3.30
NetC1_2: C1.2 JP1.1 JP1.2 Q1.3 | length 83
  Top Layer w0.254: Q1.3 55.88,3.82 C1.2
  Top Layer w0.508: JP1.2 JP1.1 18.862,45.278 28.128,45.278 29.908,43.497 29.908,2.857 v2(29.972,2.794) ; v2(51.816,3.048) 52.578,3.81 C1.2
  Bottom Layer w0.508: v2(29.972,2.794) 39.251,2.794 39.505,3.048 v2(51.816,3.048)
NetC4_2: C4.2 D1.1 D3.1 R4.2 U1.1 | length 21.2
  Top Layer w0.508: U1.1 6.755,20.347 6.742,20.334 4.469,20.334 C4.2 2.838,20.31 2.54,20.012 2.54,17.145 4.445,15.24 8.255,15.24 8.89,15.875 8.89,16.581 9.49,17.18 ; D1.1 10.795,17.145 11.415,17.765 R4.2 12.08,17.78 12.7,17.78 13.335,17.145 D3.1
NetD2_2: D2.2 R5.1 | length 1.9
  Top Layer w0.254: D2.2 50.071,3.066 R5.1
NetD4_1: D4.1 Q2.1 S1.3 S1.4 | length 11.5
  Top Layer w0.508: D4.1 60.662,3.175 61.239,3.752 Q2.1 61.239,5.994 61.889,6.644 64.411,6.644 S1.4 S1.3
NetD4_2: D4.2 R8.1 | length 2.5
  Top Layer w0.508: D4.2 63.5,3.175 64.12,3.795 R8.1
NetD5_2: D5.2 J2.3 U2.4 | length 13.9
  Top Layer w0.254: J2.3 35.368,7.936 35.56,8.128 36.068,8.128 36.435,8.495 D5.2 36.435,10.307 36.584,10.456 40.598,10.456 40.845,10.209 41.353,10.209 v1(41.402,10.16) ; v1(43.055,10.21) 43.055,9.746 44.256,8.546 U2.4
  Bottom Layer w0.254: v1(41.402,10.16) 43.006,10.16 v1(43.055,10.21)
NetD6_2: D6.2 J2.2 U2.3 | length 16.5
  Top Layer w0.254: J2.2 34.718,7.954 34.221,8.451 D6.2 34.221,10.599 34.886,11.264 v1(41.336,11.264) ; v1(43.554,10.922) 43.563,10.912 43.563,9.777 44.294,9.046 U2.3
  Bottom Layer w0.254: v1(41.336,11.264) 43.143,11.264 43.485,10.922 v1(43.554,10.922)
NetD7_2: D7.2 R13.1 | length 1.9
  Top Layer w0.508: R13.1 D7.2
NetD8_1: D8.1 R17.1 | length 1.9
  Top Layer w0.254: D8.1 34.275,24.109 R17.1
NetD9_1: D9.1 R18.1 | length 1.8
  Top Layer w0.254: R18.1 D9.1
NetF1_2: F1.2 Q1.2 R2.2 | length 6.5
  Top Layer w0.254: Q1.2 55.23,7.979 55.081,8.128 54.356,8.128 54.102,8.382 54.102,9.72 54.684,10.302 R2.2
  Top Layer w0.508: R2.2 55.372,12.012 F1.2
NetQ1_1: Q1.1 Q2.3 R2.1 | length 5.9
  Top Layer w0.254: R2.1@55.245,8.875 56.381,8.875 56.53,8.726 Q1.1 57.366,7.404 57.785,6.985 57.785,6.499 57.934,6.35 Q2.3
NetQ3_1: Q3.1 R10.1 | length 7
  Top Layer w0.254: Q3.1 60.571,29.392 60.96,29.003 60.96,25.407 61.109,25.258 R10.1
NetQ4_1: Q4.1 R11.1 | length 12
  Top Layer w0.254: R11.1 60.198,25.131 60.198,24.533 60.347,24.384 63.246,24.384 64.643,25.781 64.643,30.839 64.494,30.988 63.822,30.988 63.746,31.064 Q4.1
NetR7_1: R7.1 S1.1 S1.2 | length 6
  Top Layer w0.254: R7.1 66.055,12.2 66.294,11.961 66.294,11.027 S1.1 S1.2
NetR12_1: R12.1 U4.4 | length 3.3
  Top Layer w0.508: R12.1 54.025,15.86 54.864,15.021 56.81,15.021 56.835,15.046 U4.4
NetR13_2: R13.2 U4.2 | length 4.9
  Top Layer w0.508: U4.2 57.81,17.377 57.81,18.186 59.627,20.003 R13.2
RESET: C8.2 Q4.2 R9.1 S2.3 S2.4 U3.3 | length 43.9
  Top Layer w0.254: U3.3 v1(40.204,37.719) ; v1(45.736,37.719) 51.578,31.877 v1(51.903,31.877) ; R9.1 57.897,34.798 v1(58.703,34.798) 59.509,34.798 S2.3 ; Q4.2 62.746,32.52 v1(62.758,32.532) 63.246,33.02 64.333,33.02 v1@64.734,33.421 ; S2.4 63.645,34.018 64.193,33.47 64.755,33.47 v1(64.803,33.421) 65.405,34.023 C8.2
  Bottom Layer w0.254: v1(40.204,37.719) v1(45.736,37.719) ; v1(51.903,31.877) 62.103,31.877 v1(62.758,32.532) ; v1(58.703,34.798) 58.721,34.78 64.42,34.78 64.825,34.375 64.825,33.443 v1(64.803,33.421)
RTS: Q4.3 R10.2 U2.19 | length 33.8
  Top Layer w0.254: U2.19 48.24,19.058 49.502,20.32 v1(49.53,20.32) ; R10.2 63.097,26.558 63.246,26.707 Q4.3
  Bottom Layer w0.254: v1(49.53,20.32) 49.53,25.527 50.927,26.924 v1(63.246,26.924)
RXD0: U2.21 U3.34 | length 31.4
  Top Layer w0.254: v1(45.386,19.935) 47.03,19.935 47.24,19.725 U2.21 ; v1(53.213,35.179) U3.34
  Bottom Layer w0.254: v1(45.386,19.935) 45.386,27.352 v1(53.213,35.179)
SCK: U3.29
SCL: J4.2 R15.1 U3.36 | length 68
  Top Layer w0.254: J4.2 10.014,15.533 10.483,16.002 v1(13.208,16.002) ; v1(39.243,14.889) v1(39.243,18.923) ; v1(53.191,37.41) 53.26,37.41 53.569,37.719 U3.36
  Top Layer w0.508: U3.36 57.404,37.719 57.912,38.227 R15.1
  Bottom Layer w0.254: v1(13.208,16.002) 14.224,14.986 38.691,14.986 38.74,14.937 39.194,14.937 v1(39.243,14.889) ; v1(39.243,18.923) 39.243,23.461 v1(53.191,37.41)
SCS: J5.8 U3.33 | length 16.3
  Top Layer w0.254: U3.33 57.358,33.909 57.663,33.604 v1(57.732,33.604)
  Bottom Layer w0.254: v1(57.732,33.604) 60.625,33.604 60.93,33.909 63.597,33.909 64.743,32.764 64.743,31.142 J5.8
SDA: J4.1 R14.1 U3.37 | length 67.5
  Top Layer w0.254: J4.1 10.814,14.539 10.963,14.688 10.966,14.688 11.567,15.289 12.143,15.289 v1(12.192,15.24) ; v1(38.27,18.893) 38.299,18.864 38.299,14.449 v1(38.329,14.42) ; v1(53.318,38.291) 53.318,38.332 53.975,38.989 U3.37
  Top Layer w0.508: U3.37 57.404,38.989 58.547,40.132 R14.1
  Bottom Layer w0.254: v1(12.192,15.24) 13.012,14.42 v1(38.329,14.42) ; v1(38.27,18.893) 38.27,23.243 v1(53.318,38.291)
SERIN: A1.4 J5.3 U3.11 | length 93.9
  Top Layer w0.254: A1.4 10.922,3.937 15.24,3.937 18.034,6.731 18.034,14.986 16.764,16.256 v1(16.764,24.638) ; v1(35.56,27.559) U3.11 40.005,27.559 40.712,28.266 40.712,39.969 v1(40.714,39.972)
  Bottom Layer w0.254: v1(16.764,24.638) 32.512,24.638 35.306,27.432 35.364,27.432 35.491,27.559 v1(35.56,27.559) ; v1(40.714,39.972) 62.355,39.972 63.023,40.64 J5.3
STAYON: R8.2 U3.27 | length 35.3
  Top Layer w0.254: U3.27 v1(57.785,26.289) ; v1(65.151,26.225) 65.151,20.053 65.263,19.941 65.263,13.865 65.412,13.716 67.415,13.716 67.564,13.567 67.564,5.229 67.415,5.08 65.42,5.08 R8.2
  Bottom Layer w0.254: v1(57.785,26.289) 65.088,26.289 v1(65.151,26.225)
TXD0: U2.20 U3.35 | length 34.6
  Top Layer w0.254: v1(44.45,20.574) 47.552,20.574 47.752,20.374 47.752,11.155 47.74,11.143 U2.20 ; v1(53.213,36.449) U3.35
  Bottom Layer w0.254: v1(44.45,20.574) 44.45,27.686 v1(53.213,36.449)
VUSB: C7.2 D2.1 D3.2 D7.1 J2.1 R6.2 R7.2 U2.8 U4.1 | length 103.5
  Top Layer w0.254: C7.2 45.72,5.402 46.24,5.922 U2.8
  Top Layer w0.381: v2(34.036,16.891) 34.036,13.462 32.766,12.192 v2(32.766,10.668) 32.766,8.585 33.02,8.332 33.712,8.332 34.068,7.975 J2.1
  Top Layer w0.508: D3.2 17.42,18.182 v2(18.034,18.796) ; C7.2 46.404,4.435 47.108,5.138 47.108,5.325 v2(47.244,5.461) 47.968,5.461 48.268,5.161 D2.1 ; U4.1 60.373,17.351 ; v2(60.452,18.796) 60.373,18.717 60.373,17.351 ; D7.1 64.377,21.315 64.377,20.108 64.755,19.73 64.755,17.78 ; R7.2 64.755,17.78 ; 60.373,17.351 60.452,17.272 61.483,17.272 R6.2 64.135,17.16 64.755,17.78
  Bottom Layer w0.508: v2(18.034,18.796) 23.114,18.796 25.019,16.891 v2(34.036,16.891) 58.529,16.891 60.434,18.796 v2(60.452,18.796) ; v2(32.766,10.668) 31.54,10.668 31.242,10.37 31.242,6.109 31.54,5.811 38.315,5.811 38.346,5.842 40.132,5.842 41.473,4.501 46.265,4.501 47.225,5.461 v2(47.244,5.461)
pads on no net: J2.4 J2.6 J2.7 J2.8 J2.9 J2.S_1 J2.S_2 J5.5 J5.6 J5.7 U1.5 U2.1 U2.9 U2.10 U2.11 U2.12 U2.13 U2.14 U2.15 U2.16 U2.17 U2.18 U2.22 U2.24 U3.6 U3.8 U3.17 U3.18 U3.19 U3.20 U3.21 U3.22 U3.23 U3.26 U3.28 U3.32

## Polygon pours and split planes (outlines as drawn)
GND on Top Layer "TOP GND LYRD" (solid, remove dead copper, pour order 0): 0,48.26 70.485,48.26 70.485,0 0,0
GND on Bottom Layer "BOT GND LYRD" (solid, remove dead copper, pour order 1): 0,48.26 70.485,48.26 70.485,0 0,0

## Keep-outs
Keep-Out Layer:
  lines w0.254: 1.27,1.27 1.27,46.99 69.215,46.99 69.215,1.27 1.27,1.27

## Silkscreen, mask and mechanical layers (free items; w line width, h text height)
Mechanical 1:
  lines w0.254: 0,0 0,48.26 22.225,48.26 36.83,48.26 36.83,41.275 57.15,41.275 57.15,48.26 70.485,48.26 70.485,0 22.225,0 0,0

## Text inside footprints (layer, text, board x,y; h text height)
U2: Top Overlay "*" at 43.637,9.661 h1.27; Mechanical 13 "*" at 45.085,9.661 h1.27
U4: Top Overlay "*" at 59.167,17.923 h1.27 r270; Mechanical 13 "*" at 57.887,16.993 h1.27 r270